# Altium PCB PCB2.PcbDoc
Units mm, origin at the board's own origin, x right, y up, seen from the top; angles counter-clockwise.
Board outline 48.5 x 14.25 mm, 2 copper layers (Top Layer, Bottom Layer), stack 1.569 mm thick; 29 components, 18 nets, 80 pads, 17 vias.
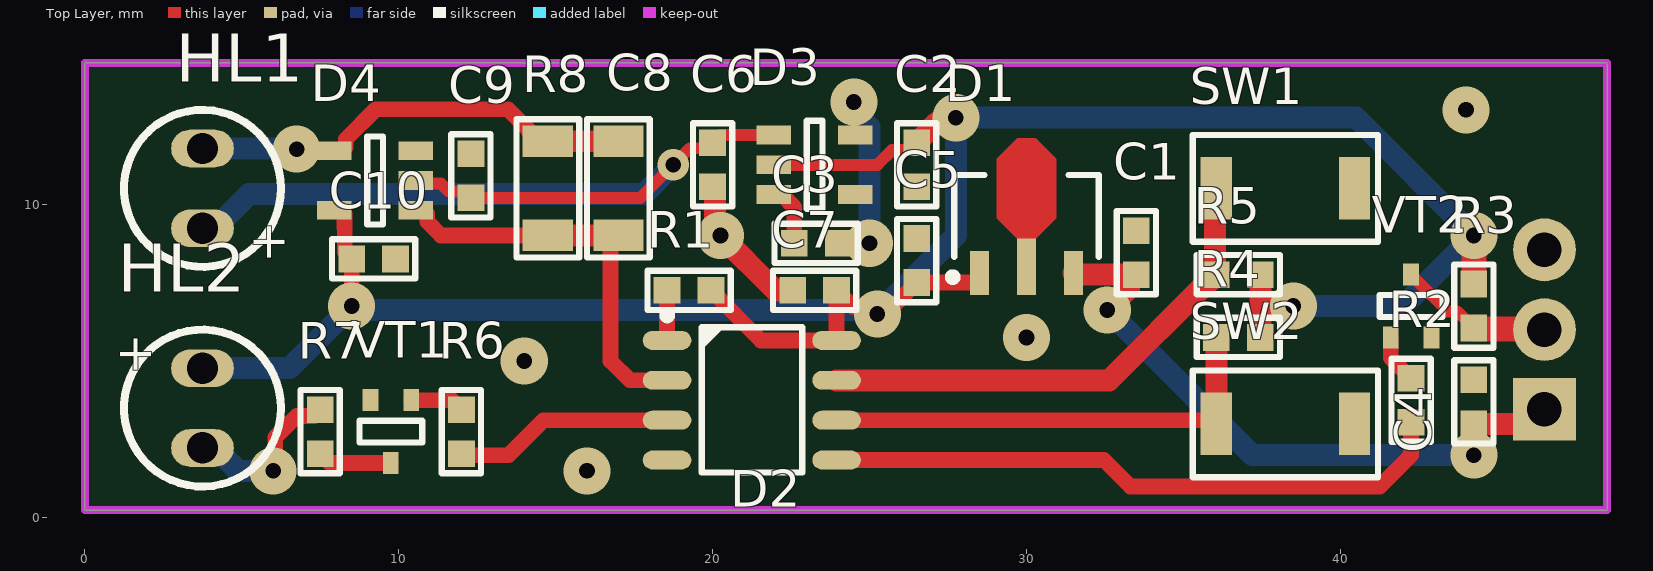
[diagram p0: Top Layer view]
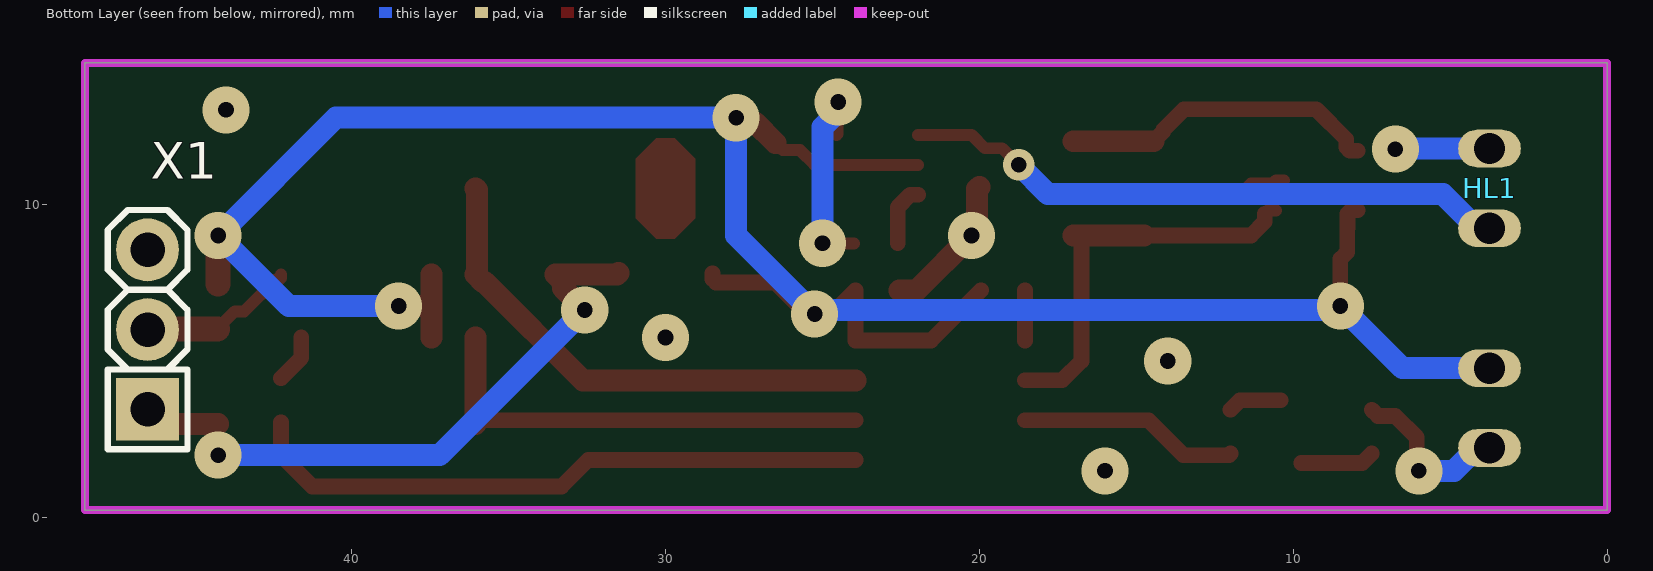
[diagram p1: Bottom Layer view, seen from below]
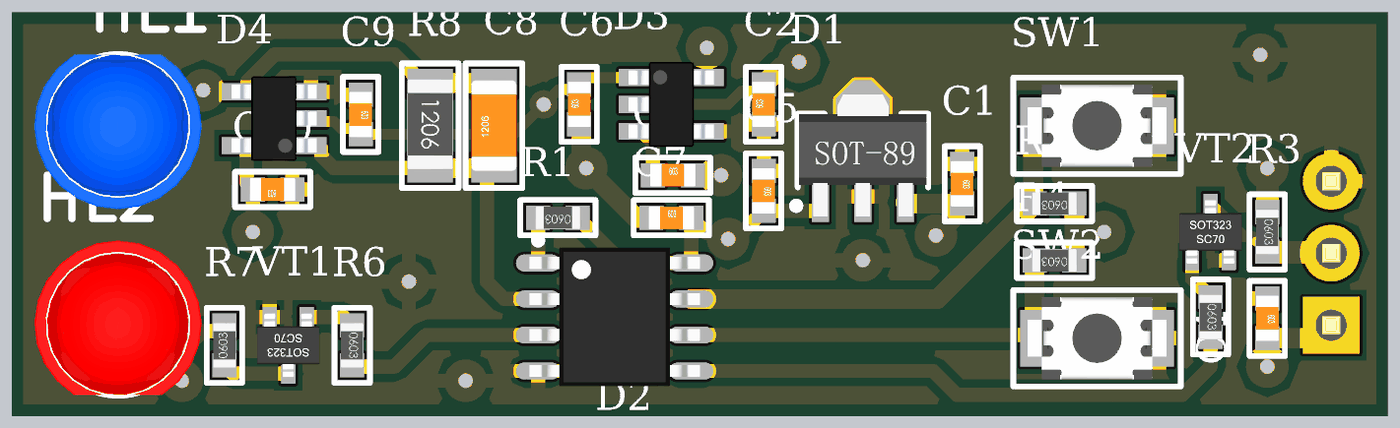
[diagram p2: 3D render of the assembled board from above, using the file's embedded part models]

## Layer stack, top to bottom
Top Solder: solder mask 0.0254, SM-001, Dk 4
Top Layer: signal copper 0.035
Dielectric 1: core 1.4986, Core-043, Dk 4.3
Bottom Layer: signal copper 0.035
Bottom Solder: solder mask 0.0254, SM-001, Dk 4

## Board outline
0,0.25 48.5,0.25 48.5,14.5 0,14.5

## Design rules (kind name [scope] priority, off if disabled: settings)
Clearance [All] p1: gap=0.254 ignorepadtopadclearanceinfootprint=FALSE except(0: Arc-Hole Track-Hole SMDPad-Hole THPad-Hole Via-Hole Fill-Hole Poly-Hole Region-Hole Text-Hole; 0.1: Via-Via Via-Fill Via-Region Via-Text Text-Text)
PolygonConnect [All] p1: connectstyle=Relief reliefconductorwidth=0.5 reliefentries=4 polygonreliefangle="90 Angle" airgapwidth=0.254
RoutingVias [All] p1: holewidth=0.711 width=1.27 viastyle="Through Hole" minholewidth=0.711 minwidth=1.27 maxholewidth=0.711 maxwidth=1.27
SolderMaskExpansion [All] p1: expansion=0.102 istentingtop=FALSE
Width [All] p1: maxlimit=3 minlimit=0.1 preferedwidth=0.254
30 further rules are at their usual default settings.

## Components (designator, comment, footprint, x,y, rotation, side; value= is the part's Value field where it differs from the comment)
C1 "Ceramic capacitor, 1μF, X7R, ±10%, 25V, 0603, -55...+125°C" "CAP: 0603" 33.5,8.45 r270 top value=1μF
C2 "Ceramic capacitor, 1μF, X7R, ±10%, 25V, 0603, -55...+125°C" "CAP: 0603" 26.5,11.25 r90 top value=1μF
C3 "Ceramic capacitor, 1μF, X7R, ±10%, 25V, 0603, -55...+125°C" "CAP: 0603" 23.3,8.75 r0 top value=1μF
C4 "Ceramic capacitor, 0.1μF, X7R, ±10%, 16V, 0603, -55...+125°C" "CAP: 0603" 44.25,3.7 r270 top value=0.1μF
C5 "Ceramic capacitor, 1μF, X7R, ±10%, 25V, 0603, -55...+125°C" "CAP: 0603" 26.5,8.2 r270 top value=1μF
C6 "Ceramic capacitor, 1μF, X7R, ±10%, 25V, 0603, -55...+125°C" "CAP: 0603" 20,11.25 r90 top value=1μF
C7 "Ceramic capacitor, 0.1μF, X7R, ±10%, 16V, 0603, -55...+125°C" "CAP: 0603" 23.25,7.25 r0 top value=0.1μF
C8 "Ceramic capacitor, 1pF, X7R, ±10%, 50V, 1206, -55...+125°C" "CAP: 1206" 17,10.5 r90 top value=1pF
C9 "Ceramic capacitor, 0.1μF, X7R, ±10%, 16V, 0603, -55...+125°C" "CAP: 0603" 12.302,10.898 r270 top value=0.1μF
C10 "Ceramic capacitor, 0.1μF, X7R, ±10%, 16V, 0603, -55...+125°C" "CAP: 0603" 9.2,8.25 r180 top value=0.1μF
D1 "Linear voltage regulator, input 3.9...18V, 0.6V, output 5V, 0.1A, -40...+85°C, SOT-89" SOT89 30,9.6 r90 top
D2 "Attiny13" 8-SOIC 21.25,3.75 r0 top
D3 ", , , , , -40...+150°C, SOT23-5" SOT23-5 23.25,11.25 r0 top
D4 "IC op amplifier, Rail-to-Rail, 20 MHz, 2.7...5.5V, -40...+125°C, SOT23-5" SOT23-5 9.25,10.75 r180 top
HL1 "" "LED: 5mm (H:0mm)(blue)" 3.75,10.5 r270 bottom
HL2 "" "LED: 5mm (H:0mm)(red)" 3.75,3.5 r90 top
R1 "Resistor film, 1K, ±5%, 0603, 0.1W, -55...+125°C" "RES: 0603" 19.25,7.25 r180 top value=1K
R2 "Resistor film, 1K, ±5%, 0603, 0.1W, -55...+125°C" "RES: 0603" 42.25,3.75 r270 top value=1K
R3 "Resistor film, 1K, ±5%, 0603, 0.1W, -55...+125°C" "RES: 0603" 44.25,6.75 r270 top value=1K
R4 "Resistor film, 1K, ±5%, 0603, 0.1W, -55...+125°C" "RES: 0603" 36.75,5.75 r180 top value=1K
R5 "Resistor film, 1K, ±5%, 0603, 0.1W, -55...+125°C" "RES: 0603" 36.75,7.75 r180 top value=1K
R6 "Resistor film, 1K, ±5%, 0603, 0.1W, -55...+125°C" "RES: 0603" 12,2.75 r270 top value=1K
R7 "Resistor film, ?, ±5%, 0603, 0.1W, -55...+125°C" "RES: 0603" 7.5,2.75 r90 top value=?
R8 "Resistor film, ?K, ±5%, 1206, 0.25W, -55...+125°C" "RES: 1206" 14.75,10.5 r270 top value=?K
SW1 ", 3*4*2mm" "BUT: 3x4x2 SMT" 38.25,10.5 r0 top
SW2 ", 3*4*2mm" "BUT: 3x4x2 SMT" 38.25,3 r0 top
VT1 "NPN transistor, 45V, 100mA, 100MHz, 300mW, 0.6V, 420, SOT-23, -55...+125°C" SC-70 9.75,2.75 r270 top
VT2 "NPN transistor, 45V, 100mA, 100MHz, 300mW, 0.6V, 420, SOT-23, -55...+125°C" SC-70 42.25,6.75 r90 top
X1 "Connector, 3pin, 2.54mm, 500VAC, 3A" "CON: PLS-3" 46.5,6 r90 bottom

## Footprints (in the part's own frame and the unit in brackets; to place one, negate y for a bottom-side part, rotate by r counter-clockwise, add the part's x,y. Pads: shape width x height; smd on the part's side, far side on the other; paste and mask are expansions set on the pad)
8-SOIC [mm] "pitch 1.27 mm"
  rrect100% 1.55x0.6 smd: 1(-2.7,1.905) 2(-2.7,0.635) 3(-2.7,-0.635) 4(-2.7,-1.905) 5(2.7,-1.905) 6(2.7,-0.635) 7(2.7,0.635) 8(2.7,1.905)
  round 0.7 on Mech1: 28(-2.395,1.8)
  silkscreen extent -2.82,-2.3 1.61,2.82, body extent -3,-2.45 3,2.45, height 1.75
"BUT: 3x4x2 SMT" [mm]
  rect 1x2 smd: 1(-2.2,0) 2(2.2,0)
  silkscreen extent -2.95,-1.7 2.95,1.7, body extent -2.45,-1.45 2.45,1.45, height 2
"CAP: 0603" [mm]
  rect 0.85x0.85 smd: 1(-0.7,0) 2(0.7,0)
  silkscreen extent -1.33,-0.63 1.33,0.63, body extent -0.8,-0.4 0.8,0.4, height 0.3
"CAP: 1206" [mm]
  rect 1x1.6 smd: 1(-1.5,0) 2(1.5,0)
  silkscreen extent -2.2,-1 2.2,1, body extent -1.6,-0.8 1.6,0.8, height 1
"CON: PLS-3" [mm]
  rect 2x2 hole 1.1: 1(-2.54,0)
  round 2 hole 1.1: 2(0,0) 3(2.54,0)
  silkscreen extent -3.81,-1.27 3.81,1.27, body extent -3.81,-1.27 3.81,1.27, height 8.54
"LED: 5mm (H:0mm)(blue)" [mm]
  oval 1.2x2 hole 1: 1(-1.27,0) 2(1.27,0)
  body extent -2.5,-2.95 2.95,2.95, height 8.6
"LED: 5mm (H:0mm)(red)" [mm]
  oval 1.2x2 hole 1: 1(-1.27,0) 2(1.27,0)
  silkscreen extent -2.5,-2.5 2.5,2.5, body extent -2.5,-2.95 2.95,2.95, height 8.6
"RES: 0603" [mm]
  rect 0.85x0.85 smd: 1(-0.7,0) 2(0.7,0)
  silkscreen extent -1.33,-0.63 1.33,0.63, body extent -0.8,-0.4 0.8,0.4, height 0.44
"RES: 1206" [mm]
  rect 1x1.6 smd: 1(-1.5,0) 2(1.5,0)
  silkscreen extent -2.2,-1 2.2,1, body extent -1.65,-0.8 1.55,0.8, height 0.47
SC-70 [mm]
  rect 0.7x0.5 smd: 1(-1,0.65) 2(-1,-0.65) 3(1,0)
  round 0.5 on Mech1: ""(-0.7,0.7)
  silkscreen extent -0.35,-1 0.35,1, body extent -1.12,-1.1 1.12,1.1, height 1.1
SOT23-5 [mm] "pitch 0.95 mm"
  rect 1.1x0.6 smd: 1(-1.3,0.95) 2(-1.3,0) 3(-1.3,-0.95) 4(1.3,-0.95) 5(1.3,0.95)
  round 0.5 on Mech1: ""(-1.1,1.1)
  silkscreen extent -0.25,-1.4 0.25,1.4, body extent -1.5,-1.5 1.5,1.5, height 1.3
SOT89 [mm]
  rect 1.4x0.6 smd: 1(-1.8,1.5) 3(-1.8,-1.5)
  rect 1.8x0.6 smd: 2(-1.6,0)
  round 0.5 on Mech1: ""(-1.8,1.8)
  Top Layer region: -0.7,0.3 -0.05,0.95 1.85,0.95 2.5,0.3 2.5,-0.3 1.85,-0.95 -0.05,-0.95 -0.7,-0.3
  silkscreen extent -2.05,-2.3 1.32,2.47, body extent -2.3,-2.25 2,2.25, height 1.51

## Part data
C1 C2 C3 C5 C6: library part Ceramic_0603, Manufacturer=Yageo, Package=0603, PartNumber=CC0603KRX7R7BB104, Temperature=-55...+125°C, Tolerance=±10%, TypeCapacitor="Ceramic capacitor", TypeDielectric=X7R, Voltage=25V, HelpURL=https://www.digikey.com/product-detail/en/yageo/CC0603KRX7R7BB104/311-1088-1-ND/302998, ValueManufacturerPartNumber="Ceramic capacitor, 1μF, X7R, ±10%, 25V, 0603, -55...+125°C"
C4 C7 C9 C10: library part Ceramic_0603, Manufacturer=Yageo, Package=0603, PartNumber=CC0603KRX7R7BB104, Temperature=-55...+125°C, Tolerance=±10%, TypeCapacitor="Ceramic capacitor", TypeDielectric=X7R, Voltage=16V, HelpURL=https://www.digikey.com/product-detail/en/yageo/CC0603KRX7R7BB104/311-1088-1-ND/302998, ValueManufacturerPartNumber="Ceramic capacitor, 0.1μF, X7R, ±10%, 16V, 0603, -55...+125°C"
C8: library part Ceramic_1206, Manufacturer=Yageo, Package=1206, PartNumber=CC1206KRX7R9BB104, Temperature=-55...+125°C, Tolerance=±10%, TypeCapacitor="Ceramic capacitor", TypeDielectric=X7R, Voltage=50V, HelpURL=https://www.digikey.com/product-detail/en/yageo/CC1206KRX7R9BB104/311-1179-1-ND/303089, ValueManufacturerPartNumber="Ceramic capacitor, 1pF, X7R, ±10%, 50V, 1206, -55...+125°C"
D1: library part L78L05, "Positive voltage regulators", CurrentOutput=0.1A, Package=SOT-89, Temperature=-40...+85°C, VoltageInput="input 3.9...18V", VoltageOutput="output 5V", ComponentType="Linear voltage regulator", HelpURL=https://belchip.by/sitedocs/00000471.pdf, MaxDropout=0.6V, PartNumber=L78L05, ValueManufacturerPartNumber="Linear voltage regulator, input 3.9...18V, 0.6V, output 5V, 0.1A, -40...+85°C, SOT-89"
D2: library part "ATtiny13 SO-8"
D3: library part TPS60403, "Voltage Inverter", Package=SOT23-5, Temperature=-40...+150°C, HelpURL=https://www.ti.com/lit/ds/symlink/tps60400-q1.pdf?ts=1617708425560&ref_url=https%253A%252F%252Fwww.google.com%252F, PartNumber=TPS60403, ValueManufacturerPartNumber=", , , , , -40...+150°C, SOT23-5"
D4: library part AD8541ARZ, "OP amplifier", Manufacturer=STMicroelectronics, Package=SOT23-5, PartNumber=TSV991ILT, Temperature=-40...+125°C, ComponentType="IC op amplifier", GainBandwidth="20 MHz", HelpURL=https://www.chipdip.by/product/ad8541ar, OutputType=Rail-to-Rail, Supply=2.7...5.5V, ValueManufacturerPartNumber="IC op amplifier, Rail-to-Rail, 20 MHz, 2.7...5.5V, -40...+125°C, SOT23-5"
HL1 HL2: library part Led, HelpURL=https://www.vishay.com/docs/82437/vlmo1300.pdf
R1 R2 R3 R4 R5 R6 R7: library part Resistor_0603, Manufacturer=Yageo, Package=0603, PartNumber=RC0603JR-07100RL, Power=0.1W, Temperature=-55...+125°C, Tolerance=±5%, TypeResistor="Resistor film", HelpURL=https://www.digikey.com/product-detail/en/yageo/RC0603JR-07100RL/311-100GRCT-ND/729644
  R1 R2 R3 R4 R5 R6: ValueManufacturerPartNumber="Resistor film, 1K, ±5%, 0603, 0.1W, -55...+125°C"
  R7: ValueManufacturerPartNumber="Resistor film, ?, ±5%, 0603, 0.1W, -55...+125°C"
R8: library part Resistor_1206, Manufacturer=Yageo, Package=1206, PartNumber=RC1206JR-07100RL, Power=0.25W, Temperature=-55...+125°C, Tolerance=±5%, TypeResistor="Resistor film", HelpURL=https://www.digikey.com/product-detail/en/yageo/RC1206JR-07100RL/311-100ERCT-ND/732153, ValueManufacturerPartNumber="Resistor film, ?K, ±5%, 1206, 0.25W, -55...+125°C"
SW1 SW2: library part Button_3x4x2_SMT, "SMT 3*4*2 2PIN", Manufacturer="xin cheng electronic", Package=3*4*2mm, PartNumber="3*4*2 2PIN", CommentText="\"Кнопка\"", HelpURL=https://aliexpress.ru/item/32309509976.html?spm=a2g0v.12010612.8148356.51.441f61b1yUlL0Q, ValueManufacturerPartNumber=", 3*4*2mm"
VT1 VT2: library part Bipolar_NPN, CurrentCE=100mA, CurrentGain=420, Frequency=100MHz, Manufacturer="ON Semiconductor", MaxPower=300mW, Package=SOT-23, PartNumber=BC817CLT1G, Temperature=-55...+125°C, VoltageCE=45V, VoltageSaturation=0.6V, HelpURL=https://www.digikey.com/product-detail/en/on-semiconductor/BC847CLT1G/BC847CLT1GOSCT-ND/917836, TypeTransistor="NPN transistor", ValueManufacturerPartNumber="NPN transistor, 45V, 100mA, 100MHz, 300mW, 0.6V, 420, SOT-23, -55...+125°C"
X1: library part PLS-3, CurrentMax=3A, Manufacturer=Connfly, VoltageMax=500VAC, CommentText="\"Разъем\"", HelpURL=https://www.chipdip.ru/product/pls-3, Multichannel=3pin, PartNumber=PLS-3, Pitch=2.54mm, TypeConnector=Connector, ValueManufacturerPartNumber="Connector, 3pin, 2.54mm, 500VAC, 3A"

## Via types
v1: diameter 1.5, hole 0.5, Top Layer to Bottom Layer, tented both sides, 16 vias
v2: diameter 1, hole 0.5, Top Layer to Bottom Layer, tented both sides, 1 vias

## Nets (pads, with @x,y where several pads share a name; then routed paths per layer and width w, separated by ;. In a path a pad name is that pad's centre, name@x,y a point inside that pad or via, vN(x,y) a via of type N, cw(c..) or ccw(c..) an arc to the next point about the centre after c; other vN are vias at no path point)
+5: C2.2 C5.2 C7.2 C10.2 D1.1 D2.8 D3.2 D4.5 HL2.2 R1.1 R3.1 R4.1 R5.1 | length 79.7
  Top Layer w0.381: D3.2 25.25,11.25 25.716,11.716 26.265,11.716 C2.2
  Top Layer w0.5: D4.5 8.164,9.8 8.273,9.691 8.273,9.227 8.286,9.214 8.286,8.464 C10.2 v1(8.5,6.75) ; R1.1 21.545,5.655 D2.8 C7.2 24.486,6.714 ; v1(25.25,6.5) 25.5,6.5 C5.2 28.39,7.5 28.5,7.609 D1.1
  Top Layer w0.7: C2.2 27.147,12.597 27.597,12.597 v1(27.75,12.75) ; R4.1 37.45,6.75 ; R5.1 37.45,6.75 ; v1(38.5,6.75) 37.45,6.75
  Top Layer w0.8: R3.1 v1(44.25,9)
  Bottom Layer w0.7: HL2.2 6.52,4.77 v1(8.5,6.75) 8.625,6.625 25.375,6.625 27.75,9 v1(27.75,12.75) 40.5,12.75 v1(44.25,9) 42,6.75 v1(38.5,6.75)
-5: C6.2 C9.2 D3.1 D4.2 HL1.2 | length 28.5
  Top Layer w0.381: D4.2@10.3,10.75 D4.2 10.648,10.652 11.348,10.652 11.604,10.396 12.104,10.396 C9.2 17.698,10.198 19.277,11.777 19.827,11.777 20.25,12.2 D3.1
  Bottom Layer w0.7: HL1.2 4.15,9.23 5.238,10.318 17.818,10.318 v2(18.75,11.25)
DATA: R3.2 VT2.3 X1.2 | length 5
  Top Layer w0.381: VT2.3 42.25,7.65 42.309,7.591 42.409,7.591 43.419,6.581 43.719,6.581 R3.2@44.275,6.025 ; X1.2@46.475,6.025 X1.2
  Top Layer w0.8: R3.2@44.275,6.025 X1.2@46.475,6.025
GND: C1.1 C2.1 C4.1 C5.1 C6.1 C7.1 C9.1 C10.1 D1.2 D2.4 D3.4 D4.3 SW1.2 SW2.2 VT1.2 VT2.2 X1.3 | length 4.7
  Top Layer w0.7: C6.1 20.075,10.475 20.075,9.391 20.25,9.216 v1(20.25,9) 22,7.25 C7.1
  other v1: 16,1.5 14,5 30,5.75 44,13
NetC3_1: C3.1 D3.3 | length 2
  Top Layer w0.5: D3.3 22.2,10.3 22.6,9.9 C3.1
NetC3_2: C3.2 D3.5 | length 6.8
  Top Layer w0.381: C3.2 v1(25,8.75) ; v1(24.5,13.25) 24.525,13.225 24.525,12.225 D3.5
  Bottom Layer w0.7: v1(24.5,13.25) 24.5,12.947 25,12.447 v1(25,8.75)
NetC8_1: C8.1 D2.2 D4.1 R8.2 | length 13.1
  Top Layer w0.381: D4.1 10.8,9.8 D4.1@10.91,9.691
  Top Layer w0.5: D4.1@10.91,9.691 10.91,9.44 11.35,9 R8.2 ; C8.1 16.75,8.75 16.75,5 17.365,4.385 D2.2
  Top Layer w0.7: R8.2 C8.1
NetC8_2: C8.2 D4.4 HL1.1 R8.1 | length 13.3
  Top Layer w0.381: HL1.1@3.75,12.02 HL1.1@3.785,11.985
  Top Layer w0.5: D4.4 8.2,11.7 8.31,11.809 8.31,12.06 9.27,13.02 13.48,13.02 14.141,12.36 14.141,12.31 R8.1@14.45,12
  Top Layer w0.7: R8.1@14.45,12 C8.2
  Bottom Layer w0.381: v1@6.73,11.77 v1(6.75,11.75)
  Bottom Layer w0.7: HL1.1 v1@6.73,11.77
NetD2_1: D2.1 R1.2 | length 1.6
  Top Layer w0.5: D2.1 R1.2
NetD2_3: D2.3 R6.2 | length 7
  Top Layer w0.5: R6.2 12.05,2 13.5,2 14.615,3.115 D2.3
NetD2_5: D2.5 R2.2 | length 20.1
  Top Layer w0.5: D2.5 32.466,1.845 33.311,1 41.25,1 42.25,2 R2.2
NetD2_6: D2.6 R4.2 SW2.1 | length 14.9
  Top Layer w0.5: D2.6 35.935,3.115 SW2.1
  Top Layer w0.7: SW2.1 R4.2
NetD2_7: D2.7 R5.2 SW1.1 | length 16.3
  Top Layer w0.7: D2.7 32.635,4.385 35.765,7.515 35.815,7.515 R5.2 36.004,7.796 36.004,10.454 SW1.1
NetHL2_1: HL2.1 R7.2 | length 6
  Top Layer w0.5: v1(6,1.5) 6,1.393 6.143,1.25 6.071,1.321 6.071,2.572 6.75,3.25 7.3,3.25 R7.2
  Bottom Layer w0.7: HL2.1 4.15,2.23 4.88,1.5 v1(6,1.5)
NetR2_1: R2.1 VT2.1 | length 1.6
  Top Layer w0.5: VT2.1 41.6,5.1 R2.1
NetR6_1: R6.1 VT1.1 | length 1.7
  Top Layer w0.5: VT1.1 11.7,3.75 R6.1
NetR7_1: R7.1 VT1.3 | length 2.4
  Top Layer w0.5: R7.1 7.8,1.75 VT1.3
VCC: C1.2 C4.2 D1.3 X1.1 | length 19.6
  Top Layer w0.381: X1.1@46.04,3 X1.1
  Top Layer w0.7: D1.3 31.55,7.75 C1.2 33.265,7.515 33.265,7.318 v1(32.572,6.625) ; C4.2 X1.1@46.04,3
  Bottom Layer w0.7: v1(32.572,6.625) 37.197,2 v1(44.25,2)
pads on no net: D1. D2.28 D3. D4. VT1. VT2.

## Polygon pours and split planes (outlines as drawn)
GND on Top Layer "GND" (solid, shelved, pour order 0): 48.5,14.5 48.5,0.25 0,0.25 0,14.5
GND on Bottom Layer "GND" (solid, shelved, pour order 1): 0,0.25 0,14.5 48.5,14.5 48.5,0.25

## Keep-outs
Keep-Out Layer:
  lines w0.254: 0,0.25 0,14.5 14.375,14.5 39.125,14.5 48.5,14.5 48.5,0.25 0,0.25

## Text inside footprints (layer, text, board x,y; h text height)
HL1: Top Overlay "+" at 4.994,9.45 h2 r270
HL2: Top Overlay "+" at 2.506,4.55 h2 r90